# Altium PCB PCB.PcbDoc
Units mil, origin at the board's own origin, x right, y up, seen from the top; angles counter-clockwise.
Board outline 3740.16 x 3740.16 mil, 2 copper layers (Top Layer, Bottom Layer); 37 components, 174 nets, 449 pads, 193 vias.
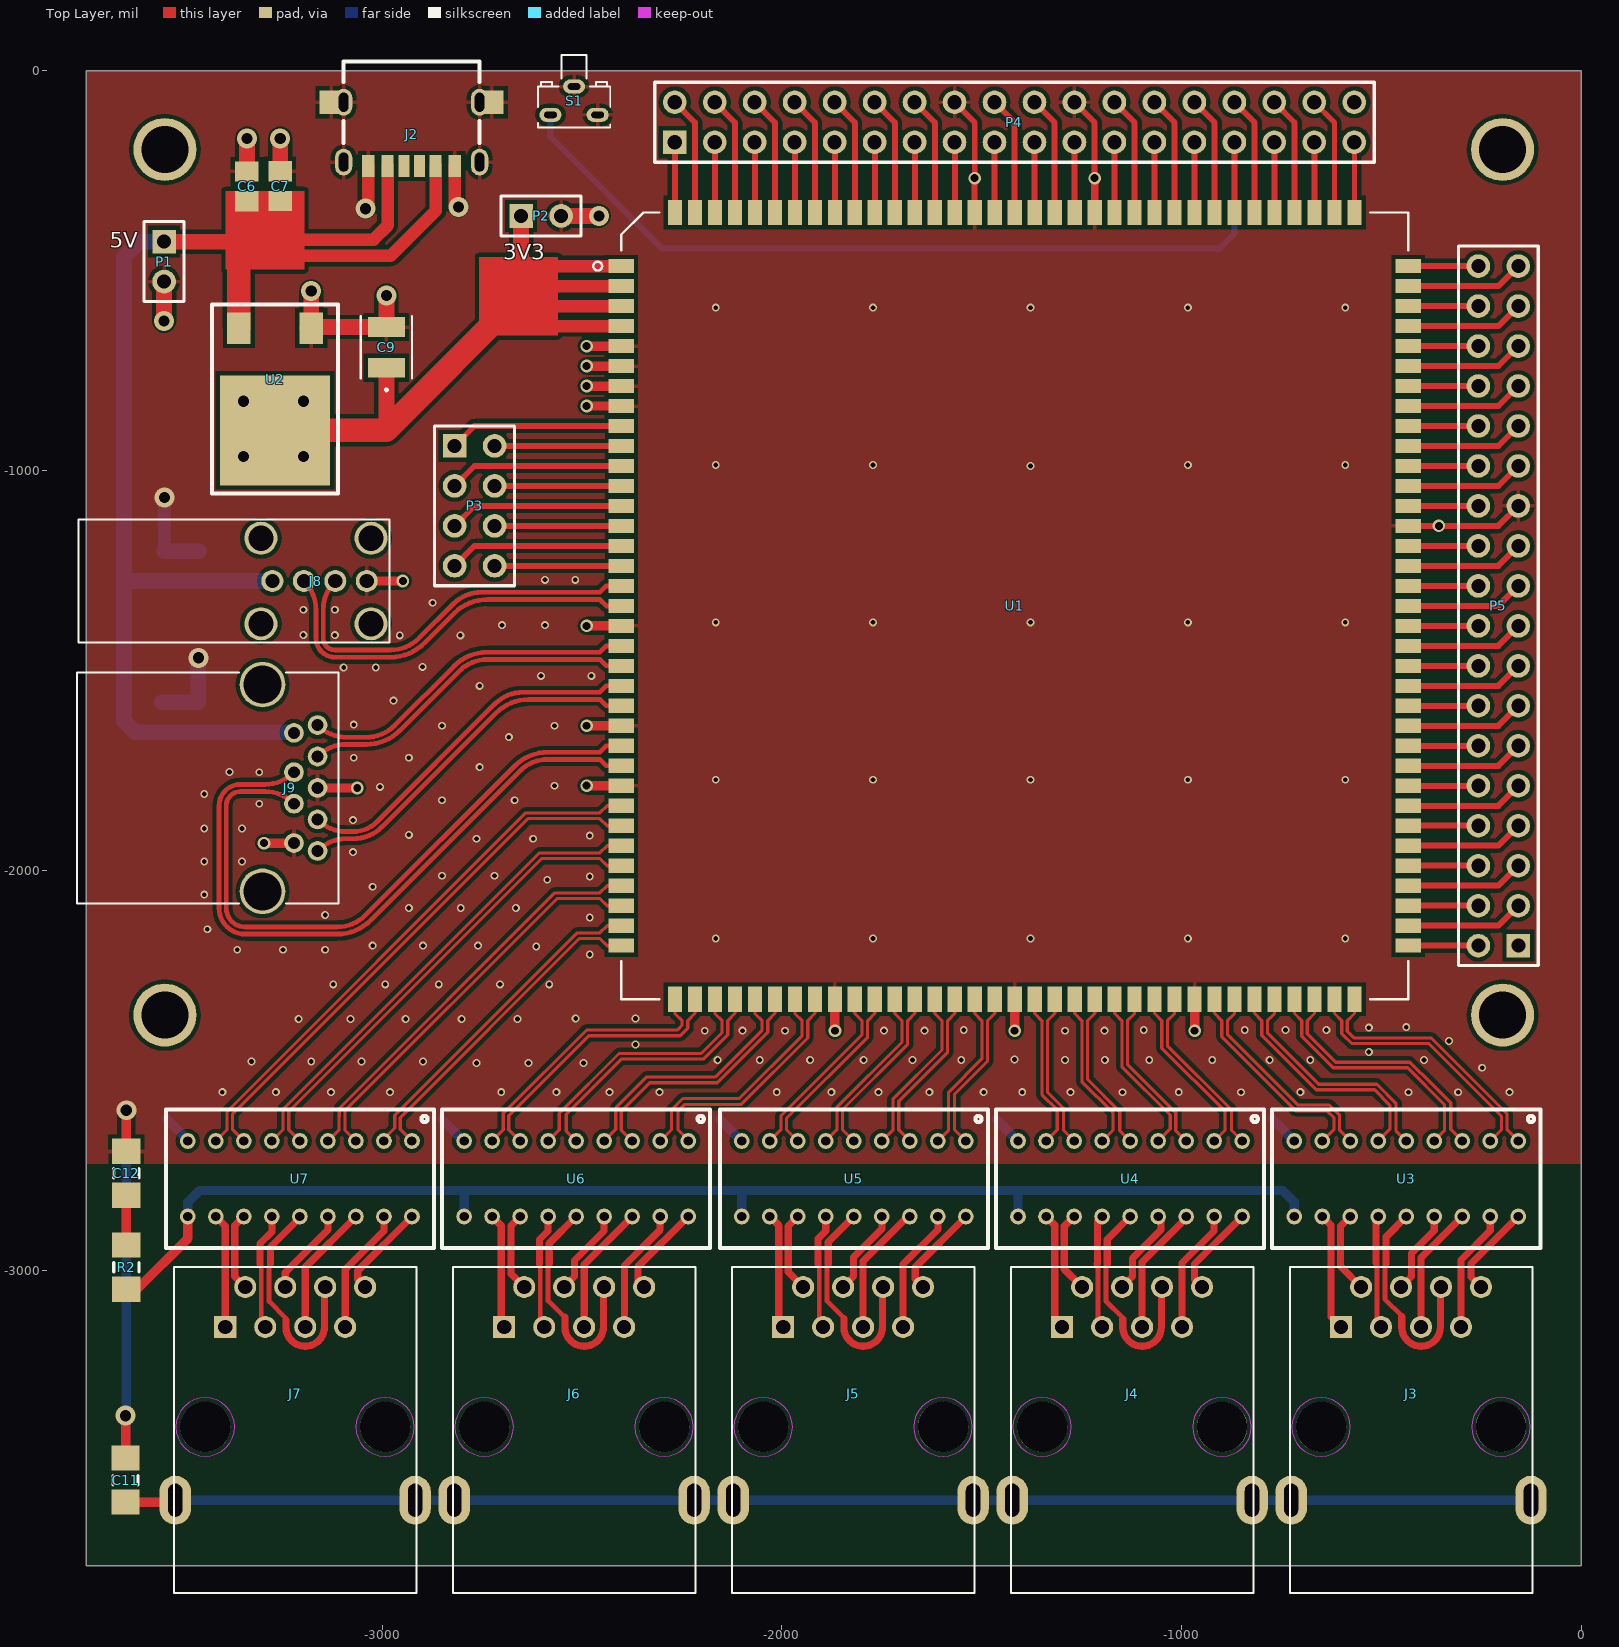
[diagram p0: Top Layer view]
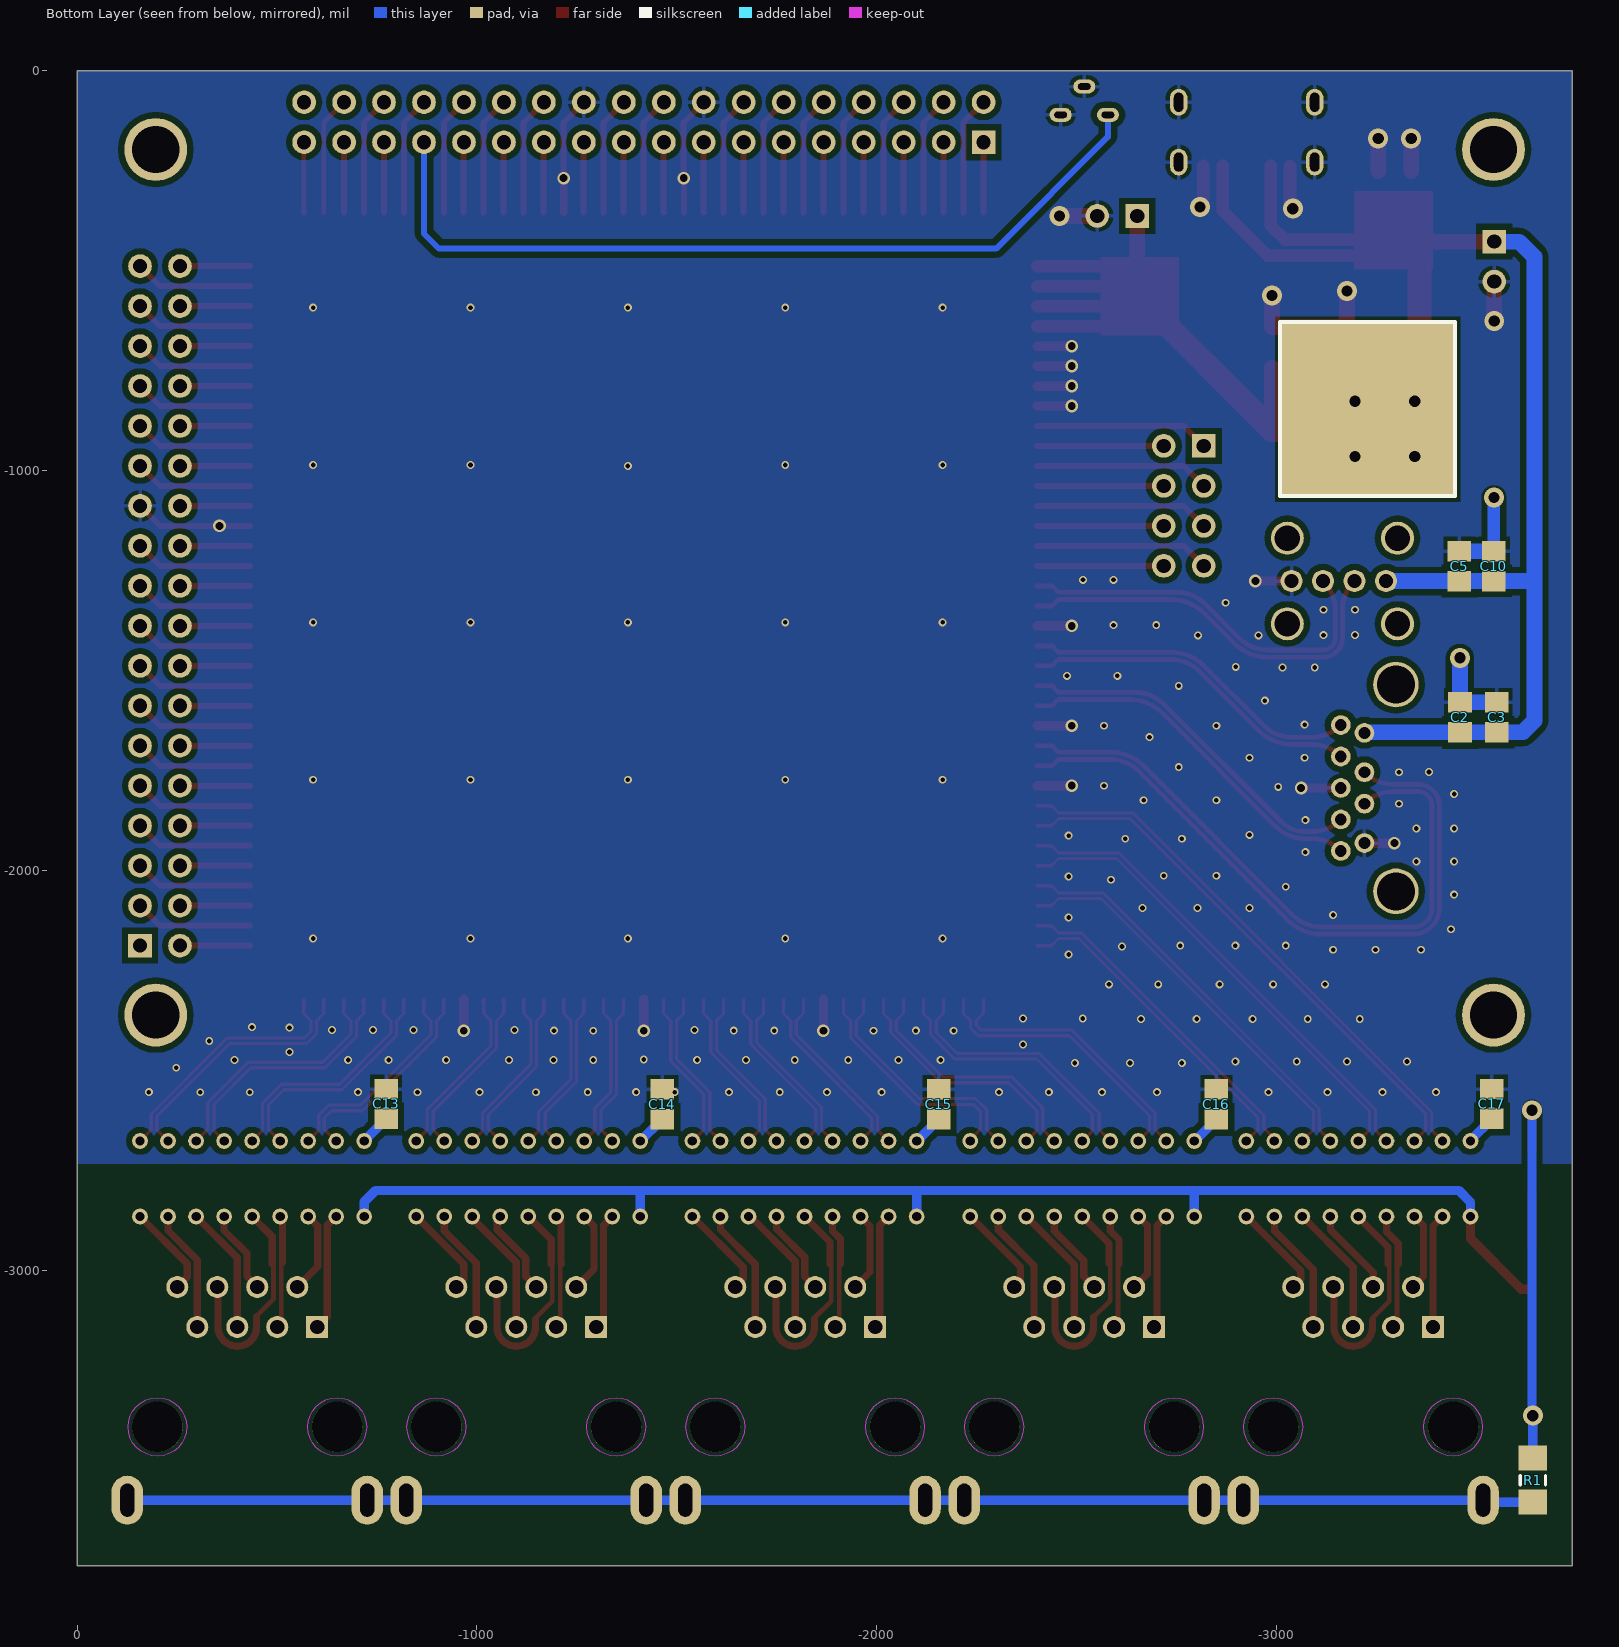
[diagram p1: Bottom Layer view, seen from below]

## Layer stack, top to bottom
Top Solder: solder mask 0.4, Solder Resist, Dk 3.5
Top Layer: signal copper 1.4
Dielectric 1: dielectric 12.6, FR-4, Dk 4.8
Bottom Layer: signal copper 1.4
Bottom Solder: solder mask 0.4, Solder Resist, Dk 3.5

## Board outline
-3740.16,0 -3740.16,-3740.16 0,-3740.16 0,0

## Design rules (kind name [scope] priority, off if disabled: settings)
Clearance Clearance_2 [InNamedPolygon('Top Layer-GND')] p1: gap=10 ignorepadtopadclearanceinfootprint=FALSE except(0: Arc-Hole Track-Hole SMDPad-Hole THPad-Hole Via-Hole Fill-Hole Poly-Hole Region-Hole Text-Hole)
Clearance Clearance_1 [InNamedPolygon('Bottom Layer-GND')] p2: gap=15 ignorepadtopadclearanceinfootprint=FALSE
Clearance [All] p3: gap=6 ignorepadtopadclearanceinfootprint=FALSE
DiffPairsRouting [All] p1: maxlimit=10 minlimit=4 mostfreqgap=6 toplayer_minwidth=8 toplayer_maxwidth=15 toplayer_prefwidth=12 bottomlayer_minwidth=8 bottomlayer_maxwidth=15 bottomlayer_prefwidth=12 maxuncoupledlength=500
PolygonConnect [All] p1: thpad.connectstyle=Relief thpad.reliefconductorwidth=10 thpad.reliefentries=4 thpad.polygonreliefangle="90 Angle" thpad.airgapwidth=10 smdpad.connectstyle=Relief smdpad.reliefconductorwidth=10 smdpad.reliefentries=4 smdpad.polygonreliefangle="90 Angle" smdpad.airgapwidth=10 via.connectstyle=Direct via.reliefconductorwidth=10 via.reliefentries=4 via.polygonreliefangle="90 Angle" via.airgapwidth=10
RoutingVias [All] p1: holewidth=28 width=50 viastyle="Through Hole" minholewidth=7.87 minwidth=15.75 maxholewidth=28 maxwidth=50
SilkToSolderMaskClearance [IsPad] p1: minsilkscreentomaskgap=15 clearancetoexposedcopper=TRUE
SolderMaskExpansion [All] p1: expansion=4
Width [All] p1: maxlimit=78.74 minlimit=10 preferedwidth=15
28 further rules are at their usual default settings.

## Classes and differential pairs
differential pair ESW_P4_D: +ESW_P4_D_P -ESW_P4_D_N
differential pair ESW_P4_C: +ESW_P4_C_P -ESW_P4_C_N
differential pair ESW_P4_B: +ESW_P4_B_P -ESW_P4_B_N
differential pair ESW_P4_A: +ESW_P4_A_P -ESW_P4_A_N
differential pair ESW_P3_D: +ESW_P3_D_P -ESW_P3_D_N
differential pair ESW_P3_C: +ESW_P3_C_P -ESW_P3_C_N
differential pair ESW_P3_B: +ESW_P3_B_P -ESW_P3_B_N
differential pair ESW_P3_A: +ESW_P3_A_P -ESW_P3_A_N
differential pair ESW_P2_D: +ESW_P2_D_P -ESW_P2_D_N
differential pair ESW_P2_C: +ESW_P2_C_P -ESW_P2_C_N
differential pair ESW_P2_B: +ESW_P2_B_P -ESW_P2_B_N
differential pair ESW_P2_A: +ESW_P2_A_P -ESW_P2_A_N
differential pair ESW_P1_D: +ESW_P1_D_P -ESW_P1_D_N
differential pair ESW_P1_C: +ESW_P1_C_P -ESW_P1_C_N
differential pair ESW_P1_B: +ESW_P1_B_P -ESW_P1_B_N
differential pair ESW_P1_A: +ESW_P1_A_P -ESW_P1_A_N
differential pair ESW_P0_D: +ESW_P0_D_P -ESW_P0_D_N
differential pair ESW_P0_C: +ESW_P0_C_P -ESW_P0_C_N
differential pair ESW_P0_B: +ESW_P0_B_P -ESW_P0_B_N
differential pair ESW_P0_A: +ESW_P0_A_P -ESW_P0_A_N
differential pair USB3: +USB3_P -USB3_N
differential pair USB3_SS_TX: +USB3_SS_TX_P -USB3_SS_TX_N
differential pair USB3_SS_RX: +USB3_SS_RX_P -USB3_SS_RX_N
differential pair USB2: +USB2_P -USB2_N
differential pair PCIE_TX2: +PCIE_TX2_P -PCIE_TX2_N
differential pair PCIE_TX1: +PCIE_TX1_P -PCIE_TX1_N
differential pair PCIE_TX0: +PCIE_TX0_P -PCIE_TX0_N
differential pair PCIE_RX2: +PCIE_RX2_P -PCIE_RX2_N
differential pair PCIE_RX1: +PCIE_RX1_P -PCIE_RX1_N
differential pair PCIE_RX0: +PCIE_RX0_P -PCIE_RX0_N
differential pair PCIE_CK2: +PCIE_CK2_P -PCIE_CK2_N
differential pair PCIE_CK1: +PCIE_CK1_P -PCIE_CK1_N
differential pair PCIE_CK0: +PCIE_CK0_P -PCIE_CK0_N

## Components (designator, comment, footprint, x,y, rotation, side; value= is the part's Value field where it differs from the comment)
C2 "Cap" 6-0805 -3459.52,-1617.35 r90 bottom value=0.1uF
C3 "Cap" 6-0805 -3551.25,-1617.35 r90 bottom value=106/10V
C5 "Cap" 6-0805 -3457.87,-1239.01 r90 bottom value=0.1uF
C6 "Cap" 6-0805 -3338.58,-289.29 r270 top value=4.7uF
C7 "Cap" 6-0805 -3254.92,-288.31 r270 top value=0.1uF
C9 "Cap Pol2" 3528B -2989.17,-691.85 r90 top value=22uF
C10 "Cap" 6-0805 -3544.49,-1239.01 r90 bottom value=106/10V
C11 "Cap" 8-1206 -3641.73,-3525.51 r270 top value=1nF
C12 "Cap" 8-1206 -3639.76,-2757.8 r90 top value=1000pF/2KV
C13 "Cap" 6-0805 -773.23,-2584.57 r90 bottom value=1nF/100V
C14 "Cap" 6-0805 -1464.17,-2585.72 r90 bottom value=1nF/100V
C15 "Cap" 6-0805 -2155.21,-2585.72 r90 bottom value=1nF/100V
C16 "Cap" 6-0805 -2850,-2585.72 r90 bottom value=1nF/100V
C17 "Cap" 6-0805 -3539.37,-2584.57 r90 bottom value=1nF/100V
J2 "USB Type-C 6P" "USB TYPE-C 6P" -2925.98,-78.74 r180 top
J3 "RJ45*1" RJ45*1 -200.79,-3392.45 r180 top
J4 "RJ45*1" RJ45*1 -898.67,-3392.45 r180 top
J5 "RJ45*1" RJ45*1 -1596.55,-3392.45 r180 top
J6 "RJ45*1" RJ45*1 -2294.44,-3392.45 r180 top
J7 "RJ45*1" RJ45*1 -2992.32,-3392.45 r180 top
J8 "USB2.0" USB2.0 -3274.41,-1276.38 r270 top locked
J9 "USB3.0" USB3.0_0 -3220.47,-1656.3 r270 top locked
P1 "Header 2" HDR1X2 -3545.28,-427.4 r270 top
P2 "Header 2" HDR1X2 -2652.17,-363.11 r0 top
P3 "Header 4X2" HDR2X4 -2818.5,-938.39 r270 top
P4 "Header 18X2" HDR2X18 -2267.91,-178.74 r0 top
P5 "Header 18X2" HDR2X18 -157.48,-2188.58 r90 top
R1 "Res2" 8-1206 -3641.73,-3525.51 r270 bottom value=1M
R2 "Res2" 8-1206 -3639.76,-2992.85 r270 top value=75
S1 "SW_PB" SW_PB -2519.68,-39.37 r90 top
U1 "MT7621A" HLK-7621 -2401.57,-488.58 r0 top locked
U2 "AMS1084CD-3.3" TO252 -3267.72,-899.45 r180 top
U3 "transformer*1" TRANSFORMER_G1801D -157.48,-2677.17 r180 top
U4 "transformer*1" TRANSFORMER_G1801D -848.42,-2677.17 r180 top
U5 "transformer*1" TRANSFORMER_G1801D -1539.46,-2677.17 r180 top
U6 "transformer*1" TRANSFORMER_G1801D -2234.25,-2677.17 r180 top
U7 "transformer*1" TRANSFORMER_G1801D -2925.2,-2677.17 r180 top

## Footprints (in the part's own frame and the unit in brackets; to place one, negate y for a bottom-side part, rotate by r counter-clockwise, add the part's x,y. Pads: shape width x height; smd on the part's side, far side on the other; paste and mask are expansions set on the pad)
6-0805 [mm] "Chip Resistor; Body 2 x 1.2 mm (LxW typ)"
  rect 1.3x1.5 smd: 1(-0.95,0) 2(0.95,0)
8-1206 [mm] "Chip Resistor; Body 3.1 x 1.6 mm (LxW typ)"
  rect 1.6x1.8 smd: 1(-1.4,0) 2(1.4,0)
  silkscreen extent -0.3,-0.8 0.3,0.8
3528B [mil]
  rect 49.68x93.03 smd paste+0 mask+0: 1(-50.92,0) 2(50.92,0)
  silkscreen extent -109,-64 78,64, body extent 0,0 10,10, height 10
HDR1X2 [mm] "Connector; Header; 2 Position"
  rect 1.5x1.5 hole 0.9: 1(0,0)
  round 1.5 hole 0.9: 2(2.54,0)
  silkscreen extent -1.27,-1.27 3.81,1.27
HDR2X4 [mm] "Connector; Header; 4x2 Position"
  rect 1.5x1.5 hole 0.9: 1(0,0)
  round 1.5 hole 0.9: 2(0,2.54) 3(2.54,0) 4(2.54,2.54) 5(5.08,0) 6(5.08,2.54) 7(7.62,0) 8(7.62,2.54)
  silkscreen extent -1.27,-1.27 8.89,3.81
HDR2X18 [mm] "Connector; Header; 18x2 Position"
  rect 1.5x1.5 hole 0.9: 1(0,0)
  round 1.5 hole 0.9: 2(0,2.54) 3(2.54,0) 4(2.54,2.54) 5(5.08,0) 6(5.08,2.54) 7(7.62,0) 8(7.62,2.54) 9(10.16,0) 10(10.16,2.54) 11(12.7,0) 12(12.7,2.54) 13(15.24,0) 14(15.24,2.54) 15(17.78,0) 16(17.78,2.54) 17(20.32,0) 18(20.32,2.54) 19(22.86,0) 20(22.86,2.54) 21(25.4,0) 22(25.4,2.54) 23(27.94,0) 24(27.94,2.54) 25(30.48,0) 26(30.48,2.54) 27(33.02,0) 28(33.02,2.54) 29(35.56,0) 30(35.56,2.54) 31(38.1,0) 32(38.1,2.54) 33(40.64,0) 34(40.64,2.54) 35(43.18,0) 36(43.18,2.54)
  silkscreen extent -1.27,-1.27 44.45,3.81
HLK-7621 [mm]
  rect 1.6x0.9 smd: 1(0,0) 2(0,-1.27) 3(0,-2.54) 4(0,-3.81) 5(0,-5.08) 6(0,-6.35) 7(0,-7.62) 8(0,-8.89) 9(0,-10.16) 10(0,-11.43) 11(0,-12.7) 12(0,-13.97) 13(0,-15.24) 14(0,-16.51) 15(0,-17.78) 16(0,-19.05) 17(0,-20.32) 18(0,-21.59) 19(0,-22.86) 20(0,-24.13) 21(0,-25.4) 22(0,-26.67) 23(0,-27.94) 24(0,-29.21) 25(0,-30.48) 26(0,-31.75) 27(0,-33.02) 28(0,-34.29) 29(0,-35.56) 30(0,-36.83) 31(0,-38.1) 32(0,-39.37) 33(0,-40.64) 34(0,-41.91) 35(0,-43.18) 71(50,-43.18) 72(50,-41.91) 73(50,-40.64) 74(50,-39.37) 75(50,-38.1) 76(50,-36.83) 77(50,-35.56) 78(50,-34.29) 79(50,-33.02) 80(50,-31.75) 81(50,-30.48) 82(50,-29.21) 83(50,-27.94) 84(50,-26.67) 85(50,-25.4) 86(50,-24.13) 87(50,-22.86) 88(50,-21.59) 89(50,-20.32) 90(50,-19.05) 91(50,-17.78) 92(50,-16.51) 93(50,-15.24) 94(50,-13.97) 95(50,-12.7) 96(50,-11.43) 97(50,-10.16) 98(50,-8.89) 99(50,-7.62) 100(50,-6.35) 101(50,-5.08) 102(50,-3.81) 103(50,-2.54) 104(50,-1.27) 105(50,0)
  rect 0.9x1.6 smd: 36(3.41,-46.59) 37(4.68,-46.59) 38(5.95,-46.59) 39(7.22,-46.59) 40(8.49,-46.59) 41(9.76,-46.59) 42(11.03,-46.59) 43(12.3,-46.59) 44(13.57,-46.59) 45(14.84,-46.59) 46(16.11,-46.59) 47(17.38,-46.59) 48(18.65,-46.59) 49(19.92,-46.59) 50(21.19,-46.59) 51(22.46,-46.59) 52(23.73,-46.59) 53(25,-46.59) 54(26.27,-46.59) 55(27.54,-46.59) 56(28.81,-46.59) 56(28.81,-46.59) 57(30.08,-46.59) 58(31.35,-46.59) 59(32.62,-46.59) 60(33.89,-46.59) 61(35.16,-46.59) 62(36.43,-46.59) 63(37.7,-46.59) 64(38.97,-46.59) 65(40.24,-46.59) 66(41.51,-46.59) 67(42.78,-46.59) 68(44.05,-46.59) 69(45.32,-46.59) 70(46.59,-46.59) 106(46.59,3.41) 107(45.32,3.41) 108(44.05,3.41) 109(42.78,3.41) 110(41.51,3.41) 111(40.24,3.41) 112(38.97,3.41) 113(37.7,3.41) 114(36.43,3.41) 115(35.16,3.41) 116(33.89,3.41) 117(32.62,3.41) 118(31.35,3.41) 119(30.08,3.41) 120(28.81,3.41) 121(27.54,3.41) 122(26.27,3.41) 123(25,3.41) 124(23.73,3.41) 125(22.46,3.41) 126(21.19,3.41) 127(19.92,3.41) 128(18.65,3.41) 129(17.38,3.41) 130(16.11,3.41) 131(14.84,3.41) 132(13.57,3.41) 133(12.3,3.41) 134(11.03,3.41) 135(9.76,3.41) 136(8.49,3.41) 137(7.22,3.41) 138(5.95,3.41) 139(4.68,3.41) 140(3.41,3.41)
  silkscreen extent -1.78,-46.59 50,3.41
RJ45*1 [mm]
  rect 1.4x1.4 / inner round 1.4 / far side rect 1.4x1.4 hole 0.9: 1(10.16,-6.35)
  round 1.4 hole 0.9: 2(8.89,-8.89) 3(7.62,-6.35) 4(6.35,-8.89) 5(5.08,-6.35) 6(3.81,-8.89) 7(2.54,-6.35) 8(1.27,-8.89)
  oval 2x3.1 hole 0.9 slot 2.1 at 90 deg: 9(13.335,4.65) 10(-1.905,4.65)
  round 3.2 hole 3.2 unplated: ""(0,0) ""(11.43,0)
  Keep-Out Layer pour cut-out: 9.567,0 9.603,-0.363 9.709,-0.713 9.881,-1.035 10.113,-1.317 10.395,-1.549 10.717,-1.721 11.067,-1.827 11.43,-1.863 11.793,-1.827 12.143,-1.721 12.465,-1.549 12.747,-1.317 12.979,-1.035 13.151,-0.713 13.257,-0.363 13.293,0 13.257,0.363 13.151,0.713 12.979,1.035 12.747,1.317 12.465,1.549 12.143,1.721 11.793,1.827 11.43,1.863 11.067,1.827 10.717,1.721 10.395,1.549 10.113,1.317 9.881,1.035 9.709,0.713 9.603,0.363
  Keep-Out Layer pour cut-out: -1.863,0 -1.827,-0.363 -1.721,-0.713 -1.549,-1.035 -1.317,-1.317 -1.035,-1.549 -0.713,-1.721 -0.363,-1.827 0,-1.863 0.363,-1.827 0.713,-1.721 1.035,-1.549 1.317,-1.317 1.549,-1.035 1.721,-0.713 1.827,-0.363 1.863,0 1.827,0.363 1.721,0.713 1.549,1.035 1.317,1.317 1.035,1.549 0.713,1.721 0.363,1.827 0,1.863 -0.363,1.827 -0.713,1.721 -1.035,1.549 -1.317,1.317 -1.549,1.035 -1.721,0.713 -1.827,0.363
  silkscreen extent -1.99,-10.15 13.41,10.55
SW_PB [mm]
  oval 0.9x1.4 hole 0.4 slot 0.8 at 90 deg: 1(-1.8,1.5) 2(-1.8,-1.5) 3(0,0)
  silkscreen extent -2.6,-2.3 2,2.3
TO252 [mm]
  rect 1.5x2 smd paste+0 mask+0: 1(-2.3,-6.5) 3(2.3,-6.5)
  rect 7x7 smd paste+0 mask+0: 2(0,0)
  silkscreen extent -4,-8 4,4
TRANSFORMER_G1801D [mm]
  round 1 hole 0.6: 1(0,0) 2(1.78,0) 3(3.56,0) 4(5.34,0) 5(7.12,0) 6(8.9,0) 7(10.68,0) 8(12.46,0) 9(14.24,0) 10(14.24,4.8) 11(12.46,4.8) 12(10.68,4.8) 13(8.9,4.8) 14(7.12,4.8) 15(5.34,4.8) 16(3.56,4.8) 17(1.78,4.8) 18(0,4.8)
  silkscreen extent -1.4,-2 15.64,6.8
USB2.0 [mm]
  round 1.4 hole 0.9: 1(0,0) 2(0,2) 3(0,4) 4(0,6)
  round 2.1 hole 1.6: 5(2.72,-0.73) 6(-2.72,-0.73) 7(2.72,6.27) 8(-2.72,6.27)
  silkscreen extent -3.9,-12.33 3.9,7.44
USB3.0_0 [mm]
  round 1.25 hole 0.75: 1(0,0) 2(2.5,0) 3(4.5,0) 4(7,0) 5(7.5,1.5) 6(5.5,1.5) 7(3.5,1.5) 8(1.5,1.5) 9(-0.5,1.5)
  round 2.9 hole 2.4: ""(-3.07,-2) ""(10.07,-2)
  silkscreen extent -3.85,-13.78 10.85,2.82
"USB TYPE-C 6P" [mm]
  rect 0.7x1.4 smd paste+0 mask+0: A5(-0.5,4.05) B5(0.5,4.05)
  rect 0.76x1.4 smd paste+0 mask+0: A9(1.52,4.05) B9(-1.52,4.05)
  rect 0.8x1.4 smd paste+0 mask+0: A12(2.75,4.05) B12(-2.75,4.05)
  rect 1.5x1.5 smd paste+0 mask+0: ""(-5.1,0) ""(5.1,0)
  oval 1.1x1.7 hole 1.2 slot 0.6 at 0 deg unplated: ""(-4.32,3.8) ""(-4.32,0) ""(4.32,3.8) ""(4.32,0)
  silkscreen extent -4.32,-2.6 4.32,2.6

## Part data
C2 C3 C5 C6 C7 C10 C11 C12 C13 C14 C15 C16 C17: "Capacitor", LatestRevisionDate=17-Jul-2002, LatestRevisionNote="Re-released for DXP Platform.", PackageDescription="Radial Cap, Thru-Hole; 2 Leads; 0.3 in Pin Spacing", PackageReference=RAD-0.3, Published=8-Jun-2000, Publisher="Altium Limited"
C9: "Polarized Capacitor (Axial)", LatestRevisionDate=17-Jul-2002, LatestRevisionNote="Re-released for DXP Platform.", PackageDescription="Polarized Capacitor; 2 Leads", PackageReference=POLAR0.8, Published=8-Jun-2000, Publisher="Altium Limited"
P1 P2: "Header, 2-Pin", LatestRevisionDate=17-Jul-2002, LatestRevisionNote="Re-released for DXP Platform.", Publisher="Altium Limited"
P3: "Header, 4-Pin, Dual row", LatestRevisionDate=17-Jul-2002, LatestRevisionNote="Re-released for DXP Platform.", Publisher="Altium Limited"
P4 P5: "Header, 18-Pin, Dual row", LatestRevisionDate=17-Jul-2002, LatestRevisionNote="Re-released for DXP Platform.", Publisher="Altium Limited"
R1 R2: "Resistor", LatestRevisionDate=17-Jul-2002, LatestRevisionNote="Re-released for DXP Platform.", PackageDescription="Axial Device, Thru-Hole; 2 Leads; 0.4 in Pin Spacing", PackageReference=AXIAL-0.4, Published=8-Jun-2000, Publisher="Altium Limited"

## Free pads (board coordinates)
  round 157.48 hole 118.11: 1(-3543.31,-196.85) 2(-196.85,-196.85) 3(-3543.31,-2362.2) 4(-196.85,-2362.2)
  rect 433.07x433.07 smd far side: 2(-3228.35,-846.46)

## Via types
v1: diameter 19.68, hole 11.81, Top Layer to Bottom Layer, tented both sides, 161 vias
v2: diameter 31.5, hole 19.68, Top Layer to Bottom Layer, tented both sides, 16 vias
v3: diameter 50, hole 28, Top Layer to Bottom Layer, tented both sides, 16 vias

## Nets (pads, with @x,y where several pads share a name; then routed paths per layer and width w, separated by ;. In a path a pad name is that pad's centre, name@x,y a point inside that pad or via, vN(x,y) a via of type N, cw(c..) or ccw(c..) an arc to the next point about the centre after c; other vN are vias at no path point)
3V3: C9.1 P2.1 pad.2@-3228.35,-846.46 U1.1 U1.2 U1.3 U1.4 U2.2 | length 1797.5
  Top Layer w31.5: -2590.55,-488.58 U1.1 ; -2580.71,-538.58 U1.2 ; -2578.74,-588.58 U1.3 ; -2574.8,-638.58 U1.4
  Top Layer w39.37: -2989.17,-898.54 C9.1 ; -2652.17,-532.8 P2.1
  Top Layer w59.06: U2.2 -2990.08,-899.45 -2989.17,-898.54 -2653.54,-562.91
  other v3: -3346.46,-964.57 -3196.85,-964.57 -3346.46,-826.77 -3196.85,-826.77
5VD: C2.1 C3.1 C5.1 C6.2 C7.2 C10.1 J2.A9 J2.B9 J8.1 J9.1 P1.1 U2.3 | length 3539.8
  Top Layer w31.5: -3291.34,-411.34 -3280.51,-422.17 -3021.25,-422.17 -2985.83,-386.75 J2.A9 ; -3290.35,-462.52 -2978.14,-462.52 -2866.14,-350.52 J2.B9
  Top Layer w39.37: P1.1 -3326.77,-427.4
  Top Layer w59.06: U2.3 -3358.27,-464.49
  Bottom Layer w39.37: P1.1 -3607.68,-427.4 -3645.67,-465.39 -3645.67,-1275.59 ; C2.1 -3222.02,-1654.76 J9.1 ; C2.1 C3.1 -3616.9,-1654.75 -3645.67,-1625.98 -3645.67,-1275.59 ; J8.1@-3274.44,-1276.41 C5.1 C10.1 -3644.85,-1276.41 -3645.67,-1275.59
A_POR_BPS: P5.12 U1.81 | length 175.6
  Top Layer w15: U1.81 P5.12
CH340_RX: P5.25 U1.94 | length 296.3
  Top Layer w15: U1.94 -207.48,-1038.58 P5.25
CH340_TX: P5.24 U1.93 | length 175.6
  Top Layer w15: U1.93 P5.24
CTS2_N: P3.7 U1.15 | length 437.6
  Top Layer w15: P3.7 -2768.7,-1188.58 U1.15
CTS3_N: P3.1 U1.9 | length 437.6
  Top Layer w15: P3.1 -2768.7,-888.58 U1.9
ESW_P0_A_N: U1.29 U7.7 | length 1365.4
  Top Layer w8: U7.7 -3374.02,-2648.82 -3374.02,-2609.45 -2635.15,-1870.58 -2455.07,-1870.58 -2437.07,-1888.58 U1.29
ESW_P0_A_P: U1.28 U7.8 | length 1388.3
  Top Layer w8: U7.8 -3388.02,-2649.43 -3388.02,-2603.65 -2640.95,-1856.58 -2455.07,-1856.58 -2437.07,-1838.58 U1.28
ESW_P0_B_N: U1.31 U7.5 | length 1186.5
  Top Layer w8: U7.5 -3233.31,-2649.36 -3233.31,-2603.51 -2600.39,-1970.58 -2455.07,-1970.58 -2437.07,-1988.58 U1.31
ESW_P0_B_P: U1.30 U7.6 | length 1209.9
  Top Layer w8: U7.6 -3248.03,-2649.61 -3248.03,-2598.43 -2606.19,-1956.58 -2455.07,-1956.58 -2437.07,-1938.58 U1.30
ESW_P0_C_N: U1.33 U7.3 | length 1005.6
  Top Layer w8: U7.3 -3092.91,-2649.61 -3092.91,-2601.78 -2561.71,-2070.58 -2455.07,-2070.58 -2437.07,-2088.58 U1.33
ESW_P0_C_P: U1.32 U7.4 | length 1029.2
  Top Layer w8: U7.4 -3107.59,-2649.33 -3107.59,-2616.46 -3106.91,-2615.78 -3106.91,-2595.98 -2567.51,-2056.58 -2455.07,-2056.58 -2437.07,-2038.58 U1.32
ESW_P0_D_N: U1.35 U7.1 | length 816.5
  Top Layer w8: U7.1 -2954.5,-2647.86 -2954.5,-2618.87 -2506.21,-2170.58 -2455.07,-2170.58 -2437.07,-2188.58 U1.35
ESW_P0_D_P: U1.34 U7.2 | length 838.7
  Top Layer w8: U7.2 -2995.28,-2671.54 -2968.5,-2644.77 -2968.5,-2613.08 -2512.01,-2156.58 -2455.07,-2156.58 -2437.07,-2138.58 U1.34
ESW_P0_LED_0: P5.6 U1.75 | length 175.6
  Top Layer w15: U1.75 P5.6
ESW_P0_LED_1: P5.7 U1.76 | length 296.3
  Top Layer w15: U1.76 -207.48,-1938.58 P5.7
ESW_P1_A_N: U1.37 U6.7 | length 692.6
  Top Layer w8: U6.7 -2682.85,-2649.04 -2682.85,-2613.85 -2482.78,-2413.78 -2254.43,-2413.78 -2235.32,-2394.66 -2235.32,-2376.33 -2217.32,-2358.33 U1.37
ESW_P1_A_P: U1.36 U6.8 | length 691.5
  Top Layer w8: U6.8 -2696.85,-2649.21 -2696.85,-2608.05 -2488.52,-2399.72 -2261.92,-2399.72 -2249.32,-2387.12 -2249.32,-2376.33 -2267.32,-2358.33 U1.36
ESW_P1_B_N: U1.39 U6.5 | length 659.7
  Top Layer w8: U6.5 -2539.37,-2652.36 -2539.37,-2610.35 -2401.46,-2472.44 -2196.06,-2472.44 -2135.32,-2411.7 -2135.32,-2376.33 -2117.32,-2358.33 U1.39
ESW_P1_B_P: U1.38 U6.6 | length 662.4
  Top Layer w8: U6.6 -2556.89,-2649.41 -2556.89,-2608.07 -2407.26,-2458.44 -2201.86,-2458.44 -2149.32,-2405.9 -2149.32,-2376.33 -2167.32,-2358.33 U1.38
ESW_P1_C_N: U1.41 U6.3 | length 624.1
  Top Layer w8: U6.3 -2401.57,-2650 -2401.57,-2602.36 -2330.71,-2531.5 -2181.6,-2531.5 -2181.45,-2531.34 -2165.01,-2531.34 -2164.85,-2531.5 -2161.3,-2531.5 -2041.28,-2411.47 -2035.32,-2405.52 -2035.32,-2376.33 -2017.32,-2358.33 U1.41
ESW_P1_C_P: U1.40 U6.4 | length 626.4
  Top Layer w8: U6.4 -2415.57,-2648.25 -2415.57,-2596.56 -2413.39,-2594.37 -2413.39,-2591.43 -2339.46,-2517.5 -2187.4,-2517.5 -2187.25,-2517.34 -2166.94,-2517.34 -2049.32,-2399.72 -2049.32,-2376.33 -2067.32,-2358.33 U1.40
ESW_P1_D_N: U1.43 U6.1 | length 589.3
  Top Layer w8: U6.1 -2234.25,-2674.04 -2259.84,-2648.45 -2259.84,-2603.24 -2242.33,-2585.72 -2101.47,-2585.72 -1935.32,-2419.57 -1935.32,-2376.33 -1917.32,-2358.33 U1.43
ESW_P1_D_P: U1.42 U6.2 | length 591.6
  Top Layer w8: U6.2 -2275.59,-2648.43 -2275.59,-2598.96 -2247.49,-2570.87 -2181.6,-2570.87 -2181.45,-2571.02 -2165.01,-2571.02 -2164.85,-2570.87 -2106.41,-2570.87 -1949.32,-2413.78 -1949.32,-2376.33 -1967.32,-2358.33 U1.42
ESW_P1_LED_0: P5.5 U1.74 | length 296.3
  Top Layer w15: U1.74 -207.48,-2038.58 P5.5
ESW_P2_A_N: U1.46 U5.7 | length 457.5
  Top Layer w8: U5.7 -1988.19,-2648.91 -1988.19,-2620.39 -1785.32,-2417.52 -1785.32,-2376.33 -1767.32,-2358.33 U1.46
ESW_P2_A_P: U1.45 U5.8 | length 457.3
  Top Layer w8: U5.8 -2002.19,-2649.34 -2002.19,-2614.59 -1799.32,-2411.72 -1799.32,-2376.33 -1817.32,-2358.33 U1.45
ESW_P2_B_N: U1.48 U5.5 | length 441
  Top Layer w8: U5.5 -1848.2,-2648.74 -1848.2,-2598.49 -1685.32,-2435.61 -1685.32,-2376.33 -1667.32,-2358.33 U1.48
ESW_P2_B_P: U1.47 U5.6 | length 440.7
  Top Layer w8: U5.6 -1862.2,-2649.51 -1862.2,-2592.69 -1699.32,-2429.81 -1699.32,-2376.33 -1717.32,-2358.33 U1.47
ESW_P2_C_N: U1.50 U5.3 | length 424
  Top Layer w8: U5.3 -1707.57,-2649.21 -1707.57,-2577.55 -1585.32,-2455.3 -1585.32,-2376.33 -1567.32,-2358.33 U1.50
ESW_P2_C_P: U1.49 U5.4 | length 424.1
  Top Layer w8: U5.4 -1721.57,-2649.04 -1721.57,-2571.75 -1599.32,-2449.5 -1599.32,-2376.33 -1617.32,-2358.33 U1.49
ESW_P2_D_N: U1.52 U5.1 | length 407.8
  Top Layer w8: U5.1 -1567.91,-2648.72 -1567.91,-2560.15 -1485.32,-2477.56 -1485.32,-2376.33 -1467.32,-2358.33 U1.52
ESW_P2_D_P: U1.51 U5.2 | length 407.4
  Top Layer w8: U5.2 -1582.68,-2650.3 -1582.68,-2555.12 -1499.32,-2471.76 -1499.32,-2376.33 -1517.32,-2358.33 U1.51
ESW_P2_LED_0: P5.4 U1.73 | length 175.6
  Top Layer w15: U1.73 P5.4
ESW_P3_A_N: U1.55 U4.7 | length 389.3
  Top Layer w8: U1.55 -1317.32,-2358.33 -1335.32,-2376.33 -1335.32,-2555.42 -1295.28,-2595.47 -1295.28,-2650.79 U4.7
ESW_P3_A_P: U1.54 U4.8 | length 389.2
  Top Layer w8: U1.54 -1367.32,-2358.33 -1349.32,-2376.33 -1349.32,-2561.22 -1311.02,-2599.52 -1311.02,-2649.21 U4.8
ESW_P3_B_N: U1.57 U4.5 | length 405.9
  Top Layer w8: U1.57 -1217.32,-2358.33 -1235.32,-2376.33 -1235.32,-2523 -1154.65,-2603.68 -1154.65,-2651.26 U4.5
ESW_P3_B_P: U1.56 U4.6 | length 405.5
  Top Layer w8: U1.56@-1267.32,-2322.83 -1267.32,-2358.33 -1249.32,-2376.33 -1249.32,-2528.8 -1171.26,-2606.86 -1171.26,-2649.61 U4.6
ESW_P3_C_N: U1.59 U4.3 | length 422.6
  Top Layer w8: U1.59 -1117.32,-2358.33 -1135.32,-2376.33 -1135.32,-2485.65 -1014.49,-2606.48 -1014.49,-2651.26 U4.3
ESW_P3_C_P: U1.58 U4.4 | length 424.3
  Top Layer w8: U1.58 -1167.32,-2358.33 -1149.32,-2376.33 -1149.32,-2491.45 -1028.49,-2612.28 -1028.49,-2646.99 U4.4
ESW_P3_D_N: U1.61 U4.1 | length 444.9
  Top Layer w8: U1.61@-1013.32,-2326.83 U1.61 -1017.32,-2358.33 -1035.32,-2376.33 -1035.32,-2439.09 -875.13,-2599.28 -875.13,-2650.46 U4.1
ESW_P3_D_P: U1.60 U4.2 | length 444.4
  Top Layer w8: U1.60@-1063.32,-2326.83 U1.60 -1067.32,-2358.33 -1049.32,-2376.33 -1049.32,-2444.89 -891.04,-2603.17 -891.04,-2649.7 U4.2
ESW_P3_LED_0: P5.3 U1.72 | length 296.3
  Top Layer w15: U1.72 -207.48,-2138.58 P5.3
ESW_P4_A_N: U1.64 U3.7 | length 534.9
  Top Layer w8: U1.64 -867.32,-2358.33 -885.32,-2376.33 -885.32,-2410.27 -708.27,-2587.32 -630.99,-2587.32 -629.81,-2588.5 -628.84,-2588.5 -604.48,-2612.86 -604.48,-2650.64 U3.7
ESW_P4_A_P: U1.63 U3.8 | length 535.6
  Top Layer w8: U1.63 -917.32,-2358.33 -899.32,-2376.33 -899.32,-2416.07 -714.07,-2601.32 -636.79,-2601.32 -618.48,-2619.63 -618.48,-2647.61 U3.8
ESW_P4_B_N: U1.66 U3.5 | length 591.2
  Top Layer w8: U1.66 -767.32,-2358.33 -785.32,-2376.33 -785.32,-2406.82 -657.01,-2535.13 -511.16,-2535.13 -463.7,-2582.59 -463.7,-2651.26 U3.5
ESW_P4_B_P: U1.65 U3.6 | length 592.1
  Top Layer w8: U1.65 -817.32,-2358.33 -799.32,-2376.33 -799.32,-2412.62 -662.8,-2549.13 -516.96,-2549.13 -478.77,-2587.32 -478.77,-2648.06 U3.6
ESW_P4_C_N: U1.68 U3.3 | length 631.3
  Top Layer w8: U1.68 -667.32,-2358.33 -685.32,-2376.33 -685.32,-2409.17 -614.47,-2480.02 -428.63,-2480.02 -371.69,-2536.96 -371.54,-2536.96 -326.77,-2581.73 -326.77,-2648.03 U3.3
ESW_P4_C_P: U1.67 U3.4 | length 634.5
  Top Layer w8: U1.67@-713.32,-2326.83 U1.67 -717.32,-2358.33 -699.32,-2376.33 -699.32,-2414.96 -620.27,-2494.02 -434.43,-2494.02 -342.52,-2585.92 -342.52,-2651.97 U3.4
ESW_P4_D_N: U1.70 U3.1 | length 652
  Top Layer w8: U1.70 -567.32,-2358.33 -585.32,-2376.33 -585.32,-2402.75 -568.86,-2419.21 -375.95,-2419.21 -185.52,-2609.64 -185.52,-2649.13 U3.1
ESW_P4_D_P: U1.69 U3.2 | length 652
  Top Layer w8: U1.69 -617.32,-2358.33 -599.32,-2376.33 -599.32,-2408.55 -574.66,-2433.21 -381.75,-2433.21 -199.52,-2615.44 -199.52,-2649.13 U3.2
ESW_P4_LED_0: P5.2 U1.71 | length 175.6
  Top Layer w15: U1.71 P5.2
GE_MDC: P5.14 U1.83 | length 175.6
  Top Layer w15: U1.83 P5.14
GE_MDIO: P5.13 U1.82 | length 296.3
  Top Layer w15: U1.82 -207.48,-1638.58 P5.13
GE_RXCLK: P5.22 U1.91 | length 175.6
  Top Layer w15: U1.91 P5.22
GE_RXD0: P5.20 U1.89 | length 175.6
  Top Layer w15: U1.89 P5.20
GE_RXD1: P5.19 U1.88 | length 296.3
  Top Layer w15: U1.88 -207.48,-1338.58 P5.19
GE_RXD2: P5.18 U1.87 | length 175.6
  Top Layer w15: U1.87 P5.18
GE_RXD3: P5.17 U1.86 | length 296.3
  Top Layer w15: U1.86 -207.48,-1438.58 P5.17
GE_RXDV: P5.21 U1.90 | length 296.3
  Top Layer w15: U1.90 -207.48,-1238.58 P5.21
GE_TXCLK: P5.16 U1.85 | length 175.6
  Top Layer w15: U1.85 P5.16
GE_TXD0: P5.11 U1.80 | length 296.3
  Top Layer w15: U1.80 -207.48,-1738.58 P5.11
GE_TXD1: P5.10 U1.79 | length 175.6
  Top Layer w15: U1.79 P5.10
GE_TXD2: P5.9 U1.78 | length 296.3
  Top Layer w15: U1.78 -207.48,-1838.58 P5.9
GE_TXD3: P5.8 U1.77 | length 175.6
  Top Layer w15: U1.77 P5.8
GE_TXEN: P5.15 U1.84 | length 296.3
  Top Layer w15: U1.84 -207.48,-1538.58 P5.15
GND: C2.2 C3.2 C5.2 C6.1 C7.1 C9.2 C10.2 C11.1 C12.2 C13.2 C14.2 C15.2 C16.2 C17.2 J2. J2.A12 J2.B12 J8.4 J9.4 J9.7 P1.2 P2.2 P4.16 P4.22 P5.23 R1.1 S1.2 S1.3 U1.5 U1.6 U1.7 U1.8 U1.19 U1.24 U1.27 U1.44 U1.53 U1.62 U1.92 U1.119 U1.125 U2.1 | length 4432
  Top Layer w15: P4.16 -1517.32,-129.33 v2@-1517.32,-268.62 ; v2(-1517.72,-268.62) -1517.72,-353.94 U1.125 ; P4.22 -1217.32,-129.33 v2@-1217.32,-265.67 ; U1.92 v2(-356.3,-1138.58) -207.48,-1138.58 P5.23
  Top Layer w18: U1.27@-2401.85,-1788.31 U1.27 ; U1.19@-2401.69,-1388.7 U1.19 ; v2@-1867.32,-2401.18 v2(-1866.93,-2401.57) ; U1.119 v2@-1217.32,-265.67
  Top Layer w23.62: C11.1 v3(-3641.73,-3364.38) ; C12.2 v3(-3639.76,-2600.32) ; v2(-3295.28,-1931.89) J9.4@-3221.55,-1931.89 ; J9.7 v2(-3062.01,-1794.09) ; J8.4 v2(-2947.83,-1276.38) ; v2(-2488.19,-1788.31) -2487.91,-1788.58 U1.27 ; v2(-2488.19,-1638.58) U1.24 ; v2(-2488.19,-1388.7) -2488.07,-1388.58 U1.19 ; v2(-2488.19,-838.58) U1.8 ; v2(-2488.19,-788.58) U1.7 ; v2(-2488.19,-738.58) U1.6 ; v2(-2488.19,-688.58) U1.5 ; v2@-1867.32,-2401.18 U1.44 ; v2(-1417.77,-2401.57) -1417.32,-2401.13 U1.53 ; v2(-967.42,-2401.57) -967.32,-2401.48 U1.62
  Top Layer w31.5: v3(-3041.34,-344.88) -3034.25,-337.79 J2.A12 ; J2.B12 -2817.72,-331.89 v3(-2808.94,-340.67)
  Top Layer w39.37: v3(-3545.28,-625.83) P1.2 ; C6.1@-3337.6,-250.91 v3(-3337.6,-169.21) ; C7.1 v3(-3254.92,-169.21) ; U2.1 v3(-3177.16,-551.18) ; U2.1@-3174.55,-640.93 C9.2 ; C9.2 v3(-2989.13,-561.93) ; P2.2 v3(-2457.68,-363.11)
  Top Layer w59.06: U2.1 U2.1@-3174.55,-640.93
  Bottom Layer w23.62: R1.1 v3(-3641.73,-3364.38) -3639.76,-3362.42 v3(-3639.76,-2600.32)
  Bottom Layer w31.5: C10.2 v3(-3544.49,-1067.76)
  Bottom Layer w39.37: C3.2 C2.2 v3(-3459.52,-1468.5) ; C10.2 C5.2
  other v1: -1147.64,-2555.42 -432.09,-2555.42 -3399.61,-2555.04 -3265.75,-2555.04 -3127.95,-2555.04 -2980.31,-2555.04 -2701.77,-2555.04 -2563.98,-2555.04 -2431.1,-2555.04 -2306.1,-2555.04 -2012.8,-2555.04 -1875.98,-2555.04 -1757.87,-2555.04 -1630.91,-2555.04 -1495.08,-2555.04 -1398.62,-2555.04 -1277.56,-2555.04 -1006.89,-2555.04 -851.38,-2555.12 -702.76,-2555.04 -308.07,-2555.12 -179.6,-2555.04 -248.03,-2494.02 -2763.78,-2482.2 -2633.86,-2482.2 -2496.06,-2482.2 -3326.77,-2478.27 -3177.17,-2478.27 -3051.18,-2478.27 -2897.64,-2478.27 -2160.43,-2474.33 -2055.12,-2474.33 -1929.13,-2474.33 -1795.28,-2474.33 -1673.23,-2474.33 -1551.18,-2474.33 -1291.34,-2474.33 -1191.93,-2474.33 -1080.71,-2474.33 -923.23,-2474.33 -779.53,-2474.33 -678.15,-2474.33 -393.7,-2474.33 -1417.77,-2473.35 -531.5,-2454.65 -2366.14,-2435.61 -330.71,-2427.09 -2192.91,-2401.57 -2098.42,-2401.18 -1992.13,-2401.57 -1744.09,-2401.18 -1642.86,-2401.18 -1291.34,-2401.57 -1192.91,-2401.13 -1544.69,-2399.53 -1094.49,-2399.72 -841.72,-2399.72 -740.16,-2399.53 -637.8,-2399.72 -531.5,-2393.62 -437.79,-2392.35 -3208.66,-2371.97 -3078.74,-2371.97 -2940.94,-2371.97 -2800.86,-2371.97 -2661.42,-2371.97 -2515.75,-2370.98 -2366.14,-2370.98 -3122.05,-2285.35 -2992.13,-2285.35 -2858.27,-2285.35 -2704.72,-2285.35 -2581.69,-2285.35 -2480.51,-2210.55 -3362.2,-2198.74 -3248.03,-2198.74 -3142.32,-2198.74 -2614.17,-2190.87 -3023.62,-2188.58 -2897.64,-2188.58 -2759.84,-2188.58 -2165.35,-2170.58 -1771.65,-2170.58 -1377.95,-2170.58 -984.25,-2170.58 -590.55,-2170.58 -3437.01,-2147.56 -2480.51,-2118.11 -3142.32,-2112.13 -2933.07,-2094.49 -2803.15,-2094.49 -2665.35,-2094.49 -3444.88,-2060.94 -3023.62,-2041.26 -2586.61,-2023.62 -2480.51,-2015.75 -2850,-2013.7 -2718.5,-2013.7 -3444.88,-1978.27 -3350.39,-1978.27 -3072.77,-1954.65 -2763.78,-1921.2 -2622.05,-1921.26 -2480.51,-1913.39 -2933.07,-1911.34 -3444.88,-1895.59 -3350.39,-1895.59 -3072.77,-1874.57 -3307.09,-1833.46 -2850,-1824.72 -2668.27,-1824.72 -3444.88,-1808.98 -3004.92,-1791.26 -2568.9,-1788.58 -2165.35,-1773.54 -1771.65,-1773.54 -1377.95,-1773.54 -984.25,-1773.54 -590.55,-1773.54 -3307.09,-1754.72 -3381.89,-1753.86 -2755.91,-1742.05 -3070.87,-1718.43 -2933.07,-1718.43 -2682.85,-1666.98 -2850,-1638.58 -2568.9,-1638.58 -3070.87,-1635.75 -2971.46,-1575.71 -2755.91,-1538.58 -2602.36,-1513.7 -2476.38,-1513.7 -3096.06,-1492.52 -3015.75,-1492.52 -2898.62,-1491.06 -2955.68,-1412.32 -2804.13,-1412.32 -3196.85,-1411.34 -3118.11,-1411.76 -2699.8,-1386.73 -2592.52,-1386.73 -2165.35,-1379.84 -1771.65,-1379.84 -1377.95,-1379.84 -984.25,-1379.84 -590.55,-1379.84 -3196.85,-1348.17 -3118.11,-1348.17 -2873.38,-1330.63 -2592.52,-1273.54 -2516.73,-1273.54 -1377.95,-988.58 -2165.35,-986.14 -1771.65,-986.14 -984.25,-986.14 -590.55,-986.14 -2165.35,-592.44 -1771.65,-592.44 -1377.95,-592.44 -984.25,-592.44 -590.55,-592.44
  other v2: -1217.32,-268.62
GPIO0: P5.35 U1.104 | length 296.3
  Top Layer w15: U1.104 -207.48,-538.58 P5.35
I2C_CLK: P5.27 U1.96 | length 296.3
  Top Layer w15: U1.96 -207.48,-938.58 P5.27
I2C_SDA: P5.28 U1.97 | length 175.6
  Top Layer w15: U1.97 P5.28
JTAG_CLK: P4.17 U1.124 | length 176.7
  Top Layer w15: U1.124@-1467.91,-353.74 U1.124 -1467.32,-179.33 P4.17
JTAG_DI: P4.19 U1.122 | length 175.8
  Top Layer w15: P4.19 -1367.32,-179.33 U1.122
JTAG_DO: P4.20 U1.121 | length 296.5
  Top Layer w15: P4.20 -1317.32,-129.33 U1.121
JTAG_MS: P4.21 U1.120 | length 175.8
  Top Layer w15: P4.21 -1267.32,-179.33 U1.120
JTAG_RST: P4.18 U1.123 | length 296.5
  Top Layer w15: P4.18 -1417.32,-129.33 U1.123
ND_ALE: P4.3 U1.138 | length 175.8
  Top Layer w15: P4.3 -2167.32,-179.33 U1.138
ND_CLE: P4.4 U1.137 | length 296.5
  Top Layer w15: P4.4 -2117.32,-129.33 U1.137
ND_CS_N: P4.5 U1.136 | length 175.8
  Top Layer w15: P4.5 -2067.32,-179.33 U1.136
ND_D0: P4.8 U1.133 | length 296.5
  Top Layer w15: P4.8 -1917.32,-129.33 U1.133
ND_D1: P4.9 U1.132 | length 175.8
  Top Layer w15: P4.9 -1867.32,-179.33 U1.132
ND_D2: P4.10 U1.131 | length 296.5
  Top Layer w15: P4.10 -1817.32,-129.33 U1.131
ND_D3: P4.11 U1.130 | length 175.8
  Top Layer w15: P4.11 -1767.32,-179.33 U1.130
ND_D4: P4.12 U1.129 | length 296.5
  Top Layer w15: P4.12 -1717.32,-129.33 U1.129
ND_D5: P4.13 U1.128 | length 175.8
  Top Layer w15: P4.13 -1667.32,-179.33 U1.128
ND_D6: P4.14 U1.127 | length 296.5
  Top Layer w15: P4.14 -1617.32,-129.33 U1.127
ND_D7: P4.15 U1.126 | length 176.7
  Top Layer w15: U1.126@-1567.91,-353.74 U1.126 -1567.32,-179.33 P4.15
ND_RB_N: P4.7 U1.134 | length 175.8
  Top Layer w15: P4.7 -1967.32,-179.33 U1.134
ND_RE_N: P4.6 U1.135 | length 296.5
  Top Layer w15: P4.6 -2017.32,-129.33 U1.135
ND_WE_N: P4.2 U1.139 | length 296.5
  Top Layer w15: P4.2 -2217.32,-129.33 U1.139
ND_WP: P4.1 U1.140 | length 175.8
  Top Layer w15: P4.1 -2267.32,-179.33 U1.140
NetC11_2: C11.2 J3.9 J3.10 J4.9 J4.10 J5.9 J5.10 J6.9 J6.10 J7.9 J7.10 R1.2 | length 3692.2
  Top Layer w23.62: C11.2 -3522.43,-3580.63 J7.9 J7.9@-3517.32,-3527.94
  Bottom Layer w23.62: R1.2 -3522.43,-3580.63 J7.9 J7.10 J6.9 J6.10 J5.9 J5.10 J4.9 J4.10 J3.9 J3.10
NetC12_1: C12.1 R2.1 | length 124.8
  Top Layer w23.62: R2.1 C12.1
NetC13_1: C13.1 U3.9 | length 78
  Bottom Layer w23.62: C13.1 -773.23,-2622.05 U3.9
NetC14_1: C14.1 U4.9 | length 77.5
  Bottom Layer w23.62: C14.1 -1463.1,-2623.12 U4.9
NetC15_1: C15.1 U5.9 | length 77.5
  Bottom Layer w23.62: C15.1 -2101.17,-2677.17 U5.9
NetC16_1: C16.1 U6.9 | length 77.5
  Bottom Layer w23.62: C16.1 -2795.96,-2677.17 U6.9
NetC17_1: C17.1 U7.9 | length 77.4
  Bottom Layer w23.62: C17.1 -3485.83,-2675.51 U7.9
NetJ3_1: J3.1 U3.11 | length 295.9
  Top Layer w18: U3.11 -625.98,-2888.19 -625.98,-3117.25 J3.1
NetJ3_2: J3.2 U3.12 | length 207.5
  Top Layer w18: U3.12 -601.98,-2890.17 -601.98,-2991.25 J3.2
NetJ3_3: J3.3 U3.13 | length 283.7
  Top Layer w12: -513.83,-2981.83 cw(c-521.07,-2989.07) -510.83,-2989.07 -510.83,-3132.41 J3.3
  Top Layer w18: -513.83,-2981.83 -513.83,-2872.09 U3.13
NetJ3_4: J3.4 U3.15 | length 210.7
  Top Layer w18: J3.4 -424.79,-3016.45 -424.79,-2958.17 -367.72,-2901.1 U3.15
NetJ3_5: J3.5 U3.16 | length 319
  Top Layer w18: J3.5 -400.79,-2969.29 U3.16
NetJ3_6: J3.6 U3.14 | length 567.7
  Top Layer w12: -488.19,-2984.17 ccw(c-481.06,-2991.3) -491.14,-2991.3 -491.14,-3072.76 -449.01,-3114.89 -449.01,-3117.05
  Top Layer w18: -488.19,-2984.17 -488.19,-2916.54 U3.14 ; -449.01,-3117.05 -449.01,-3143.26 ccw(c-400.79,-3142.45) -352.56,-3142.45 -352.56,-3044.22 J3.6
NetJ3_7: J3.7 U3.17 | length 306.6
  Top Layer w18: J3.7 -300.79,-2974.6 -227.56,-2901.37 U3.17
NetJ3_8: J3.8 U3.18 | length 235.5
  Top Layer w18: J3.8 -275.59,-3017.65 -275.59,-2984.25 U3.18
NetJ4_1: J4.1 U4.11 | length 293
  Top Layer w18: U4.11 -1317.32,-2887.8 -1317.32,-3123.8 J4.1
NetJ4_2: J4.2 U4.12 | length 204.9
  Top Layer w18: U4.12 -1293.32,-2890.57 -1293.32,-2997.8 J4.2
NetJ4_3: J4.3 U4.13 | length 282.4
  Top Layer w12: -1211.61,-2984.17 cw(c-1218.74,-2991.3) -1208.66,-2991.3 -1208.66,-3132.46 J4.3@-1201.62,-3139.5
  Top Layer w18: -1211.61,-2984.17 -1210.59,-2983.14 -1210.59,-2877.91 U4.13
NetJ4_4: J4.4 U4.15 | length 219.8
  Top Layer w18: J4.4 -1122.67,-3016.45 -1122.67,-2970.8 -1051.18,-2899.31 -1051.18,-2873.62 U4.15
NetJ4_5: J4.5 U4.16 | length 321.9
  Top Layer w18: J4.5 -1098.67,-2980.75 -988.58,-2870.66 U4.16
NetJ4_6: J4.6 U4.14 | length 570.5
  Top Layer w12: -1186.02,-2984.17 ccw(c-1178.9,-2991.3) -1188.98,-2991.3 -1188.98,-3077.68 -1146.89,-3119.76 -1146.89,-3122.95
  Top Layer w18: -1186.02,-2984.17 -1186.02,-2923.43 U4.14 ; -1146.89,-3122.95 -1146.89,-3143.26 ccw(c-1098.67,-3142.45) -1050.44,-3142.45 -1050.44,-3044.22 J4.6
NetJ4_7: J4.7 U4.17 | length 309.5
  Top Layer w18: J4.7 -998.67,-2982.4 -918.5,-2902.23 U4.17
NetJ4_8: J4.8 U4.18 | length 233.4
  Top Layer w18: J4.8 -967.42,-3023.71 -967.42,-2985.13 U4.18
NetJ5_1: J5.1 U5.11 | length 290.2
  Top Layer w18: U5.11 -2007.87,-2888.28 -2007.87,-3131.13 J5.1
NetJ5_2: J5.2 U5.12 | length 201.7
  Top Layer w18: U5.12 -1983.87,-2890.08 -1983.87,-3005.13 J5.2
NetJ5_3: J5.3 U5.13 | length 285.2
  Top Layer w12: -1909.45,-2984.17 cw(c-1916.58,-2991.3) -1906.5,-2991.3 -1906.5,-3132.51 J5.3@-1899.47,-3139.54
  Top Layer w18: -1909.45,-2984.17 -1909.45,-2921.87 -1889.86,-2902.28 U5.13
NetJ5_4: J5.4 U5.15 | length 216.4
  Top Layer w18: J5.4 -1820.55,-3016.45 -1820.55,-2968.11 -1749.7,-2897.26 U5.15
NetJ5_5: J5.5 U5.16 | length 327.7
  Top Layer w18: J5.5 -1796.55,-2978.06 -1684.64,-2866.14 U5.16
NetJ5_6: J5.6 U5.14 | length 573.3
  Top Layer w12: -1883.86,-2985.16 ccw(c-1876.73,-2992.29) -1886.81,-2992.29 -1886.81,-3077.68 -1844.78,-3119.71 -1844.78,-3120.98
  Top Layer w18: -1883.86,-2985.16 -1883.86,-2930.22 U5.14 ; -1844.78,-3120.98 -1844.78,-3143.26 ccw(c-1796.55,-3142.45) -1748.33,-3142.45 -1748.33,-3044.22 J5.6
NetJ5_7: J5.7 U5.17 | length 312.4
  Top Layer w18: J5.7 -1696.55,-2985.79 -1609.54,-2898.78 U5.17
NetJ5_8: J5.8 U5.18 | length 237.1
  Top Layer w18: J5.8 -1666.4,-3022.6 -1666.4,-2993.08 U5.18
NetJ6_1: J6.1 U6.11 | length 288.9
  Top Layer w18: U6.11 -2701.77,-2889.17 -2701.77,-3135.12 J6.1
NetJ6_2: J6.2 U6.12 | length 199.7
  Top Layer w18: U6.12 -2677.77,-2889.19 -2677.77,-3009.12 J6.2
NetJ6_3: J6.3 U6.13 | length 287.2
  Top Layer w12: -2606.3,-2984.17 cw(c-2611.05,-2988.93) -2604.33,-2988.93 -2604.33,-3132.56 J6.3@-2596.38,-3140.51
  Top Layer w18: -2606.3,-2984.17 -2606.3,-2923.93 -2584.65,-2902.28 U6.13
NetJ6_4: J6.4 U6.15 | length 217.7
  Top Layer w18: J6.4 -2518.44,-3016.45 -2518.44,-2976.23 -2444.49,-2902.28 U6.15
NetJ6_5: J6.5 U6.16 | length 326
  Top Layer w18: J6.5 -2494.44,-2986.17 U6.16
NetJ6_6: J6.6 U6.14 | length 575.5
  Top Layer w12: -2581.69,-2984.06 ccw(c-2574.56,-2991.19) -2584.65,-2991.19 -2584.65,-3077.68 -2583.01,-3077.68 -2542.66,-3118.03
  Top Layer w18: -2581.69,-2984.06 -2581.69,-2933.27 U6.14 ; -2542.66,-3118.03 -2542.66,-3143.26 ccw(c-2494.44,-3142.45) -2446.21,-3142.45 -2446.21,-3044.22 J6.6
NetJ6_7: J6.7 U6.17 | length 313.6
  Top Layer w18: J6.7 -2393.7,-3141.71 -2393.7,-2988.79 -2304.33,-2899.42 U6.17
NetJ6_8: J6.8 U6.18 | length 234.9
  Top Layer w18: J6.8 -2360.08,-3026.81 -2360.08,-2991.97 U6.18
NetJ7_1: J7.1 U7.11 | length 286
  Top Layer w18: U7.11 -3392.32,-2889.57 J7.1
NetJ7_2: J7.2 U7.12 | length 196.5
  Top Layer w18: U7.12 -3368.32,-2888.8 -3368.32,-3016.45 J7.2
NetJ7_3: J7.3 U7.13 | length 293.4
  Top Layer w12: -3305.12,-2984.17 cw(c-3312.25,-2991.3) -3302.17,-2991.3 -3302.17,-3132.61 J7.3
  Top Layer w18: -3305.12,-2984.17 -3305.12,-2933.58 -3275.59,-2904.05 U7.13
NetJ7_4: J7.4 U7.15 | length 220.6
  Top Layer w18: J7.4 -3242.32,-3006.1 -3135.43,-2899.21 U7.15
NetJ7_5: J7.5 U7.16 | length 328.9
  Top Layer w18: J7.5 -3192.32,-2993.11 U7.16
NetJ7_6: J7.6 U7.14 | length 577.3
  Top Layer w12: -3279.15,-2984.17 ccw(c-3271.11,-2992.22) -3282.48,-2992.22 -3282.48,-3078.66 -3240.54,-3120.6 -3240.54,-3124.7
  Top Layer w18: -3279.15,-2984.17 -3279.15,-2942.47 -3205.51,-2868.83 U7.14 ; -3240.54,-3124.7 -3240.54,-3143.26 ccw(c-3192.32,-3142.45) -3144.09,-3142.45 -3144.09,-3044.22 J7.6
NetJ7_7: J7.7 U7.17 | length 316.5
  Top Layer w18: J7.7 -3092.32,-2998.94 -2995.28,-2901.89 U7.17
NetJ7_8: J7.8 U7.18 | length 240.3
  Top Layer w18: J7.8 -3061.02,-3023.75 -3061.02,-3001.97 U7.18
NetR2_2: R2.2 U3.10 U4.10 U5.10 U6.10 U7.10 | length 3327.2
  Top Layer w23.62: R2.2 -3613,-3047.96 -3485.83,-2920.79 U7.10
  Bottom Layer w23.62: U7.10 -3485.83,-2830.24 -3456.69,-2801.1 -2787.4,-2801.1 ; U6.10 -2794.88,-2808.58 -2787.4,-2801.1 ; U5.10 -2100.09,-2806.71 -2094.49,-2801.1 ; U4.10 -1409.05,-2804.65 -1405.51,-2801.1 ; U3.10 -718.11,-2829.8 -746.81,-2801.1 -1405.51,-2801.1 ; -2787.4,-2801.1 -2094.49,-2801.1 ; -2094.49,-2801.1 -1405.51,-2801.1
PCIE_CK0_N: P4.23 U1.118 | length 175.8
  Top Layer w15: P4.23 -1167.32,-179.33 U1.118
PCIE_CK0_P: P4.24 U1.117 | length 296.5
  Top Layer w15: P4.24 -1117.32,-129.33 U1.117
PCIE_CK1_N: P4.31 U1.110 | length 175.8
  Top Layer w15: P4.31 -767.32,-179.33 U1.110
PCIE_CK1_P: P4.30 U1.111 | length 296.5
  Top Layer w15: P4.30 -817.32,-129.33 U1.111
PCIE_CK2_N: P5.33 U1.102 | length 296.3
  Top Layer w15: U1.102 -207.48,-638.58 P5.33
PCIE_CK2_P: P5.34 U1.103 | length 175.6
  Top Layer w15: U1.103 P5.34
PCIE_RX0_N: P4.27 U1.114 | length 175.8
  Top Layer w15: P4.27 -967.32,-179.33 U1.114
PCIE_RX0_P: P4.28 U1.113 | length 296.5
  Top Layer w15: P4.28 -917.32,-129.33 U1.113
PCIE_RX1_N: P4.32 U1.109 | length 296.5
  Top Layer w15: P4.32 -717.32,-129.33 U1.109
PCIE_RX1_P: P4.33 U1.108 | length 175.8
  Top Layer w15: P4.33 -667.32,-179.33 U1.108
PCIE_RX2_N: P5.32 U1.101 | length 175.6
  Top Layer w15: U1.101 P5.32
PCIE_RX2_P: P5.31 U1.100 | length 296.3
  Top Layer w15: U1.100 -207.48,-738.58 P5.31
PCIE_TX0_N: P4.26 U1.115 | length 296.5
  Top Layer w15: P4.26 -1017.32,-129.33 U1.115
PCIE_TX0_P: P4.25 U1.116 | length 175.8
  Top Layer w15: P4.25 -1067.32,-179.33 U1.116
PCIE_TX1_N: P4.34 U1.107 | length 296.5
  Top Layer w12: P4.34 -617.32,-129.33 U1.107
PCIE_TX1_P: P4.35 U1.106 | length 176.7
  Top Layer w12: P4.35 -567.32,-179.33 U1.106
  Top Layer w15: U1.106@-567.91,-353.74 U1.106
PCIE_TX2_N: P5.29 U1.98 | length 296.3
  Top Layer w15: U1.98 -207.48,-838.58 P5.29
PCIE_TX2_P: P5.30 U1.99 | length 175.6
  Top Layer w15: U1.99 P5.30
PERST_N: P5.36 U1.105 | length 175.6
  Top Layer w15: U1.105 P5.36
RESET: P5.26 U1.95 | length 175.6
  Top Layer w15: U1.95 P5.26
RTS2_N: P3.6 U1.14 | length 317
  Top Layer w15: P3.6 U1.14@-2401.77,-1138.39 ; -2480.51,-1138.39 -2480.31,-1138.58
RTS3_N: P3.8 U1.16 | length 317
  Top Layer w15: P3.8 U1.16@-2401.77,-1238.39 ; -2480.51,-1238.39 -2480.31,-1238.58
RXD2: P3.3 U1.11 | length 437.6
  Top Layer w15: P3.3 -2768.7,-988.58 U1.11
RXD3: P3.5 U1.13 | length 437.6
  Top Layer w15: P3.5 -2768.7,-1088.58 U1.13
TXD2: P3.2 U1.10 | length 317
  Top Layer w15: P3.2 U1.10@-2401.77,-938.39 ; -2480.51,-938.39 -2480.31,-938.58
TXD3: P3.4 U1.12 | length 317
  Top Layer w15: P3.4 U1.12@-2401.77,-1038.39 ; -2480.51,-1038.39 -2480.31,-1038.58
USB2_N: J8.2 U1.18 | length 998.4
  Top Layer w12: J8.2 -3194.59,-1277.46 cw(c-3265.3,-1348.17) -3165.3,-1348.17 -3165.3,-1419.63 ccw(c-3118.11,-1419.63) -3118.11,-1466.82 -2978.43,-1466.82 ccw(c-2978.43,-1348.82) -2895,-1432.26 -2819.87,-1357.14 cw(c-2736.44,-1440.58) -2736.44,-1322.58 -2455.07,-1322.58 -2439.07,-1338.58 U1.18
USB2_P: J8.3 U1.17 | length 971.7
  Top Layer w12: J8.3 -3118.01,-1277.46 ccw(c-3047.3,-1348.17) -3147.3,-1348.17 -3147.3,-1419.63 ccw(c-3118.11,-1419.63) -3118.11,-1448.82 -2978.43,-1448.82 ccw(c-2978.43,-1348.82) -2907.72,-1419.53 -2822.06,-1333.87 cw(c-2751.35,-1404.58) -2751.35,-1304.58 -2455.07,-1304.58 -2439.07,-1288.58 U1.17
USB3_N: J9.2 U1.26 | length 1703.8
  Top Layer w12: J9.2 -3221.55,-1755.81 cw(c-3292.26,-1685.09) -3292.26,-1785.09 -3354.28,-1785.09 ccw(c-3354.28,-1838.58) -3407.76,-1838.58 -3407.76,-2094.49 ccw(c-3342.52,-2094.49) -3342.52,-2159.73 -3112.29,-2159.73 ccw(c-3112.29,-2041.73) -3028.85,-2125.18 -2655.55,-1751.87 cw(c-2584.84,-1822.58) -2584.84,-1722.58 -2455.07,-1722.58 -2439.07,-1738.58 U1.26
USB3_P: J9.3 U1.25 | length 1647.2
  Top Layer w12: J9.3 -3221.55,-1832.38 ccw(c-3292.26,-1903.09) -3292.26,-1803.09 -3354.28,-1803.09 ccw(c-3354.28,-1838.58) -3389.76,-1838.58 -3389.76,-2094.49 ccw(c-3342.52,-2094.49) -3342.52,-2141.73 -3112.29,-2141.73 ccw(c-3112.29,-2041.73) -3041.58,-2112.44 -2668.27,-1739.14 cw(c-2584.84,-1822.58) -2584.84,-1704.58 -2455.07,-1704.58 -2439.07,-1688.58 U1.25
USB3_SS_RX_N: J9.5 U1.23 | length 909.7
  Top Layer w12: J9.5 -3159.68,-1949.84 cw(c-3090.55,-2018.97) -3090.55,-1921.2 -3072.77,-1921.2 ccw(c-3072.77,-1816.99) -2999.08,-1890.68 -2715.54,-1607.14 cw(c-2632.11,-1690.58) -2632.11,-1572.58 -2566.99,-1572.58 -2455.07,-1572.58 -2439.07,-1588.58 U1.23
USB3_SS_RX_P: J9.6 U1.22 | length 911.2
  Top Layer w12: J9.6 -3159.68,-1874.57 ccw(c-3090.55,-1805.44) -3090.55,-1903.2 -3072.77,-1903.2 ccw(c-3072.77,-1816.99) -3011.81,-1877.95 -2717.73,-1583.87 cw(c-2647.02,-1654.58) -2647.02,-1554.58 -2566.99,-1554.58 -2455.07,-1554.58 -2439.07,-1538.58 U1.22
USB3_SS_TX_N: J9.8 U1.21 | length 853.3
  Top Layer w12: J9.8 -3160.34,-1714.27 cw(c-3089.63,-1784.98) -3089.63,-1684.98 -3039.11,-1684.98 ccw(c-3039.11,-1566.98) -2955.68,-1650.43 -2807.12,-1501.87 cw(c-2736.41,-1572.58) -2736.41,-1472.58 -2455.07,-1472.58 -2439.07,-1488.58 U1.21
USB3_SS_TX_P: J9.9 U1.20 | length 853.3
  Top Layer w12: J9.9 -3160.34,-1637.7 ccw(c-3089.63,-1566.98) -3089.63,-1666.98 -3039.11,-1666.98 ccw(c-3039.11,-1566.98) -2968.4,-1637.69 -2819.85,-1489.14 cw(c-2736.41,-1572.58) -2736.41,-1454.58 -2455.07,-1454.58 -2439.07,-1438.58 U1.20
WPS: P4.29 S1.1 U1.112 | length 2301.7
  Top Layer w15: P4.29 -867.32,-179.33 U1.112
  Bottom Layer w15: S1.1 -2578.74,-165.35 -2299.21,-444.88 -905.51,-444.88 -867.91,-407.28 P4.29
pads on no net: J2.A5 J2.B5 J3. J4. J5. J6. J7. J8.5 J8.6 J8.7 J8.8 J9. P4.36 P5.1

## Polygon pours and split planes (outlines as drawn)
GND on Bottom Layer "Bottom Layer-GND" (solid, pour order 14): -3740.16,0 -3740.16,-2734.17 0,-2734.17 0,0
GND on Top Layer "Top Layer-GND" (solid, pour order 16): -3740.16,0 0,0 0,-2734.17 -3740.16,-2734.17

## Other copper
Top Layer:
  rectangle net 3V3: -2756.89,-662.32 -2560.04,-465.47
  rectangle net 5VD: -3391.44,-496.97 -3194.59,-300.12

## Silkscreen, mask and mechanical layers (free items; w line width, h text height)
Top Overlay:
  text "5V" at -3681.1,-442.91 h39.37
  text "3V3" at -2696.85,-472.44 h39.37
Bottom Overlay:
  lines w10: -3446.85,-1063.9 -3446.85,-628.86 -3009.84,-628.86 -3009.84,-1063.9 -3446.85,-1063.9
Mechanical 1:
  lines w10: 0,-1.89 0,-3740.16 -3740.16,-3740.16 -3740.16,0 0,0